# Altium PCB IRDA.PcbDoc
Units mil, origin at the board's own origin, x right, y up, seen from the top; angles counter-clockwise.
Board outline 3020 x 2198 mil, 4 copper layers (Top Layer, PwrPlane, GndPlane, Bottom Layer); 52 components, 34 nets, 373 pads, 123 vias.
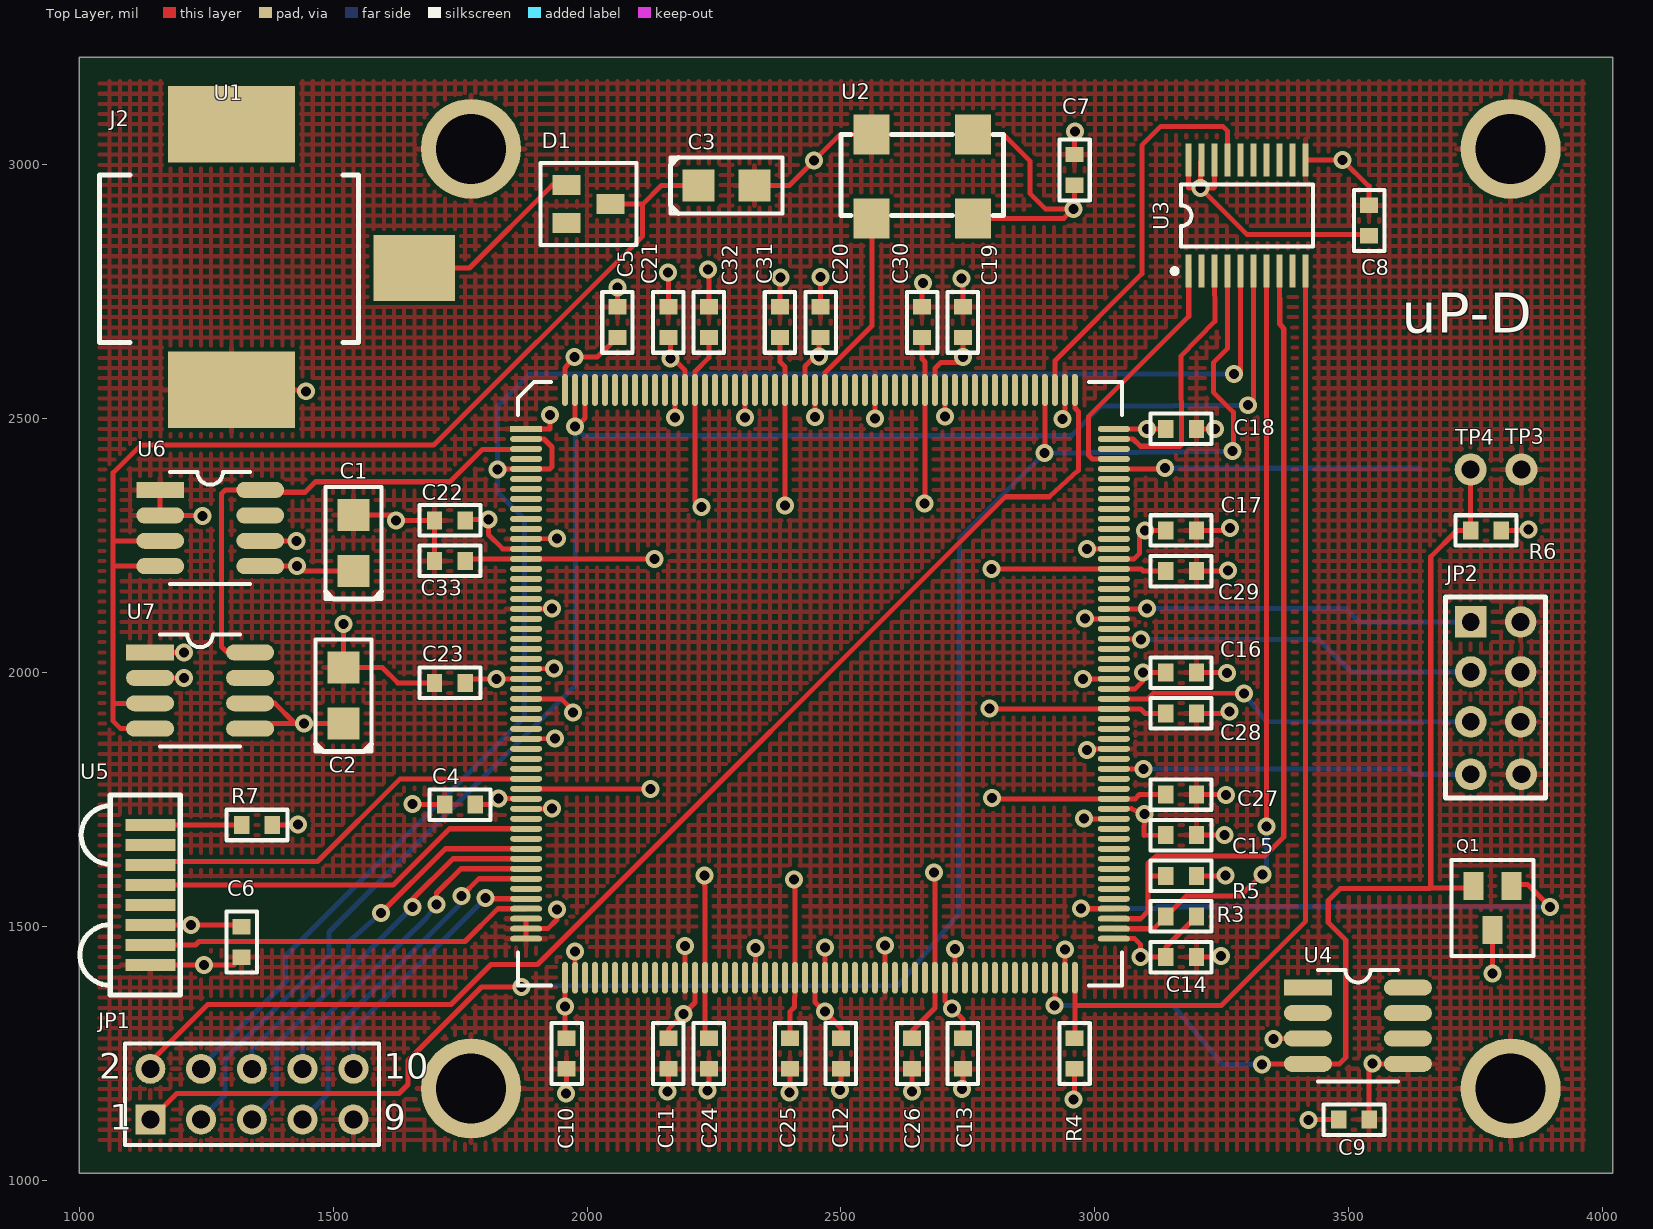
[diagram p0: Top Layer view]
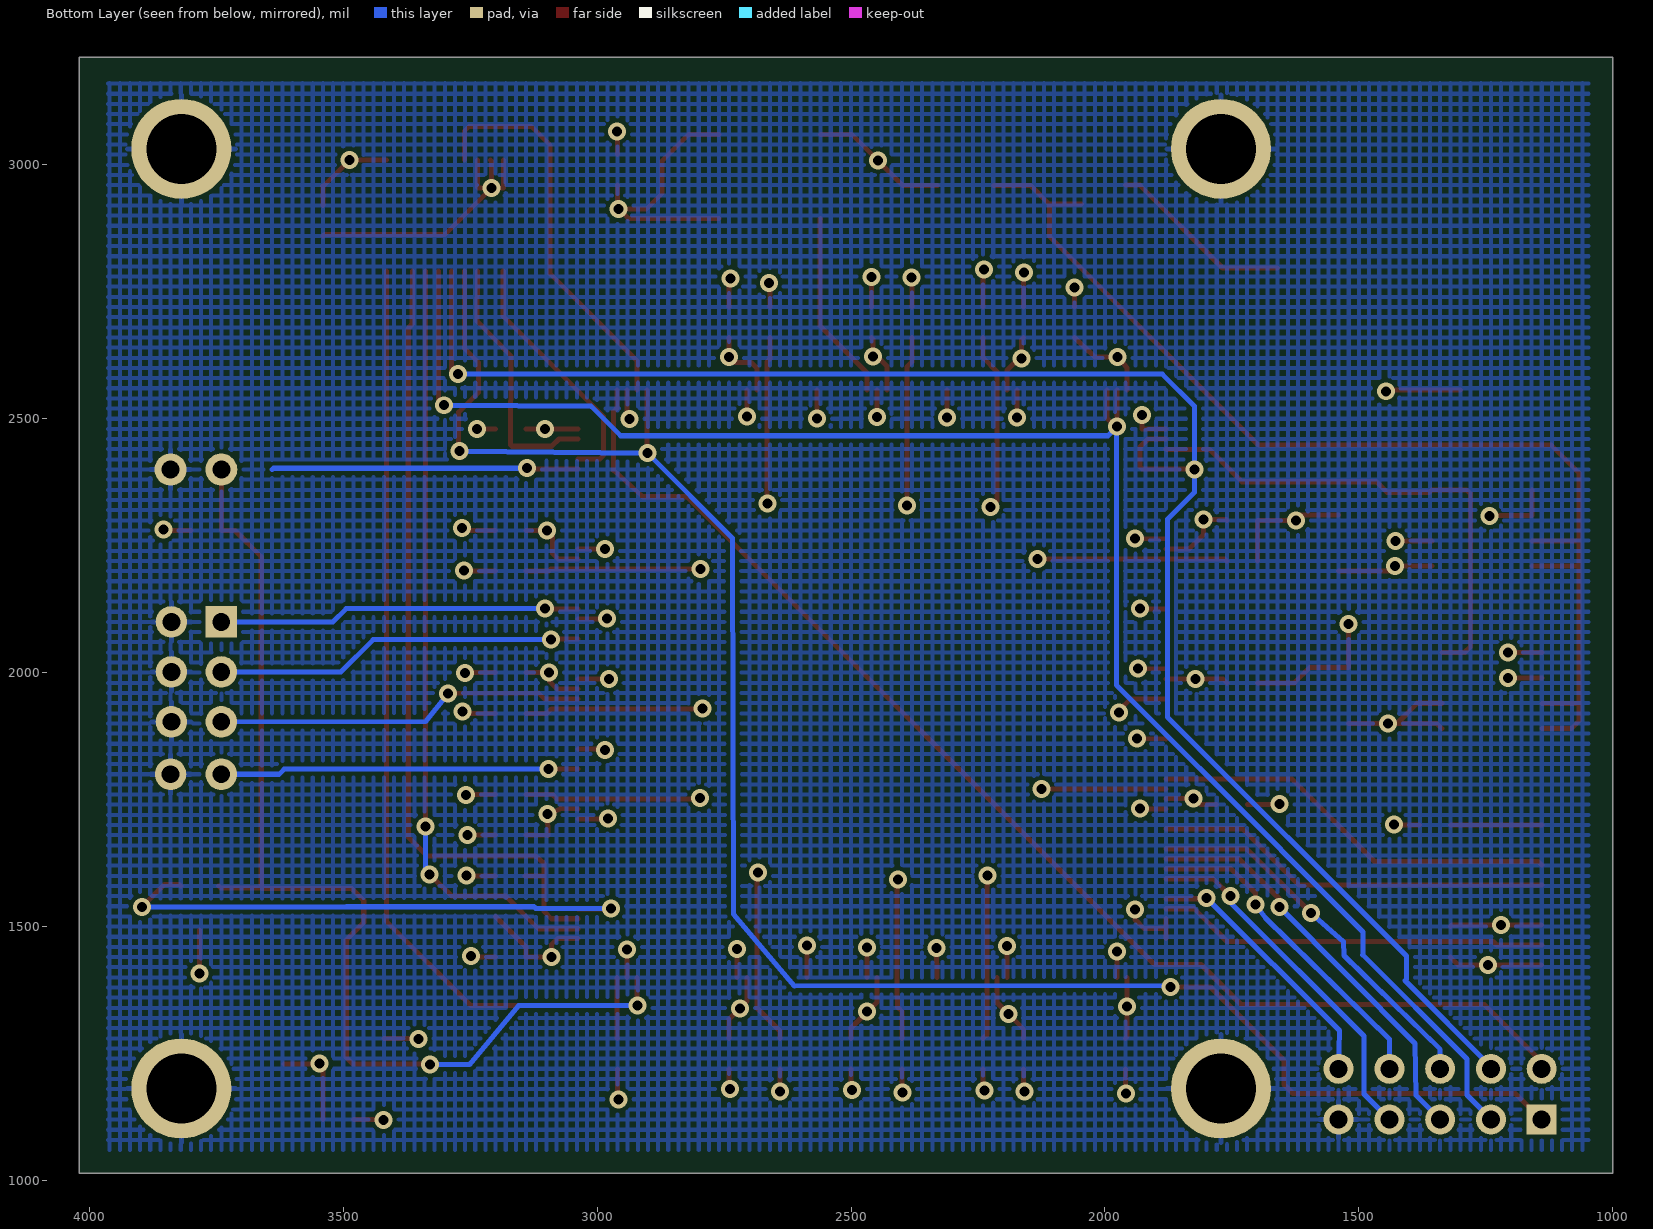
[diagram p1: Bottom Layer view, seen from below]
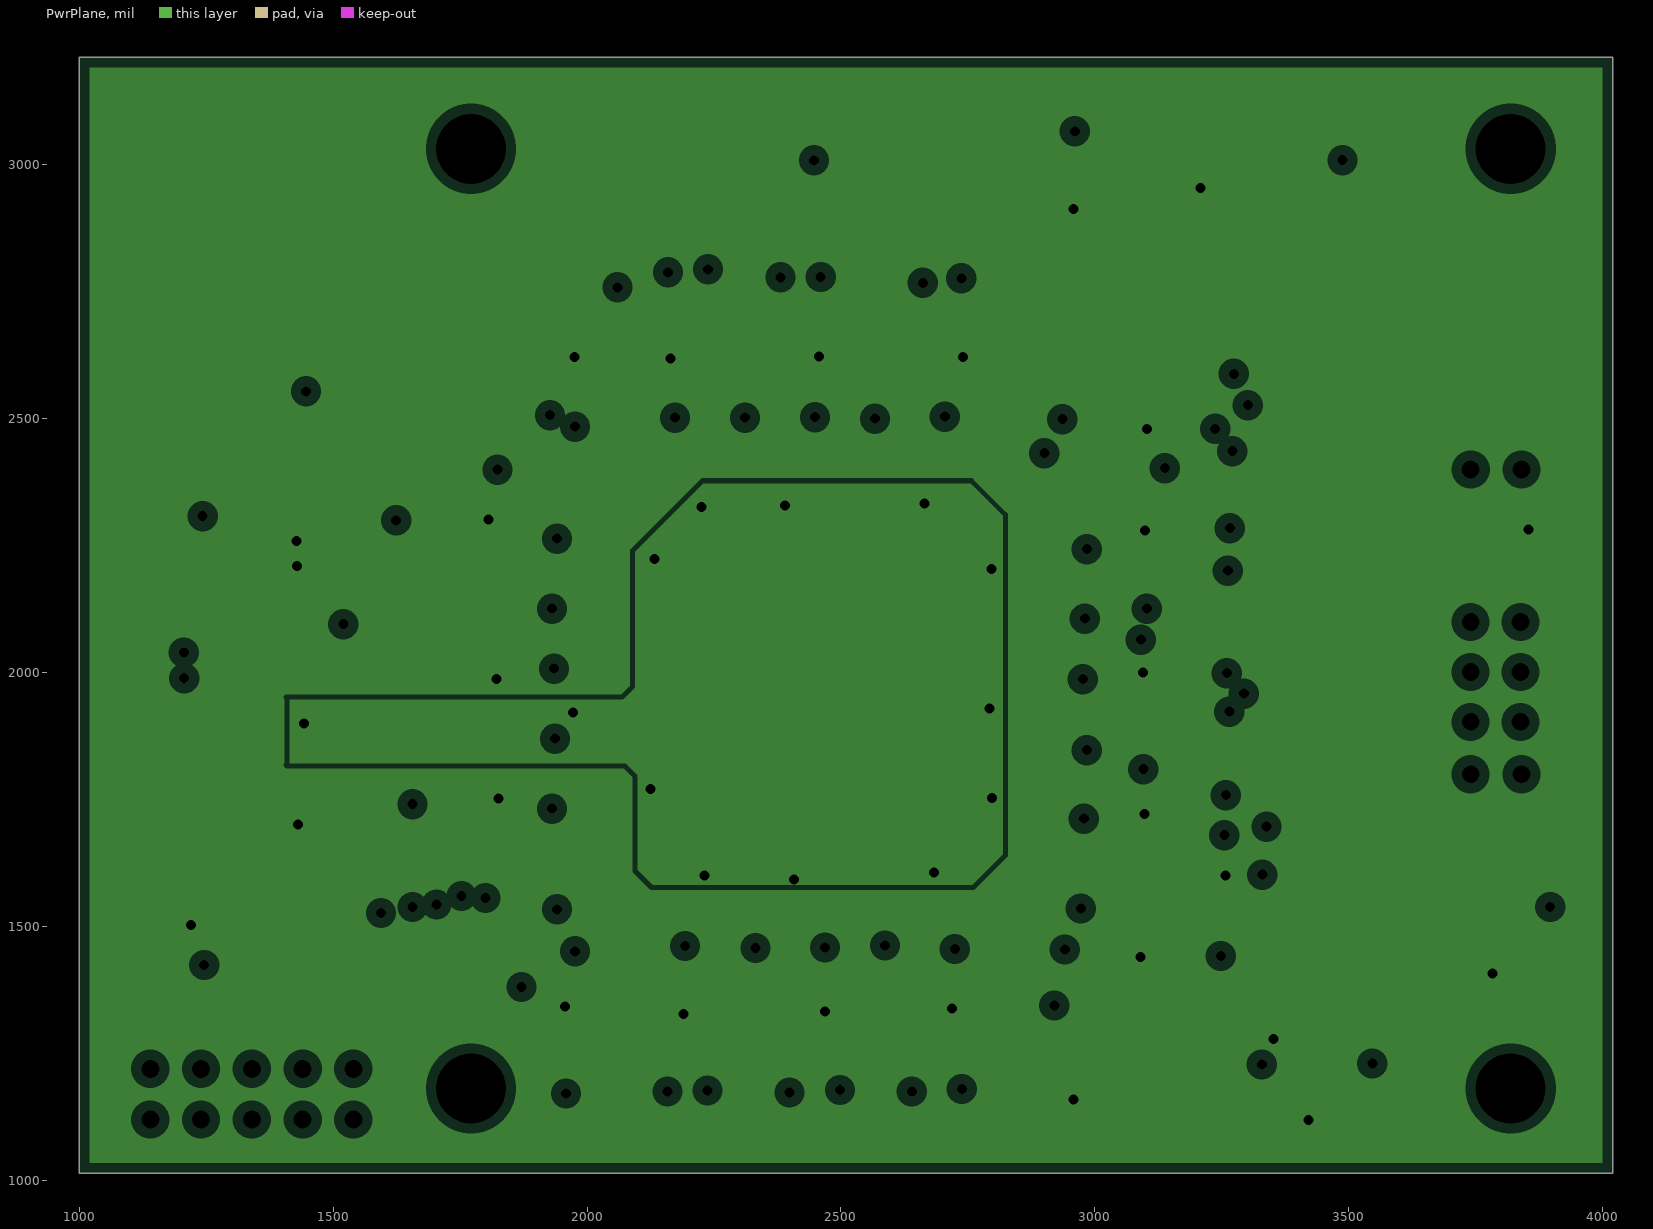
[diagram p2: PwrPlane, clearances drawn from the general rule]
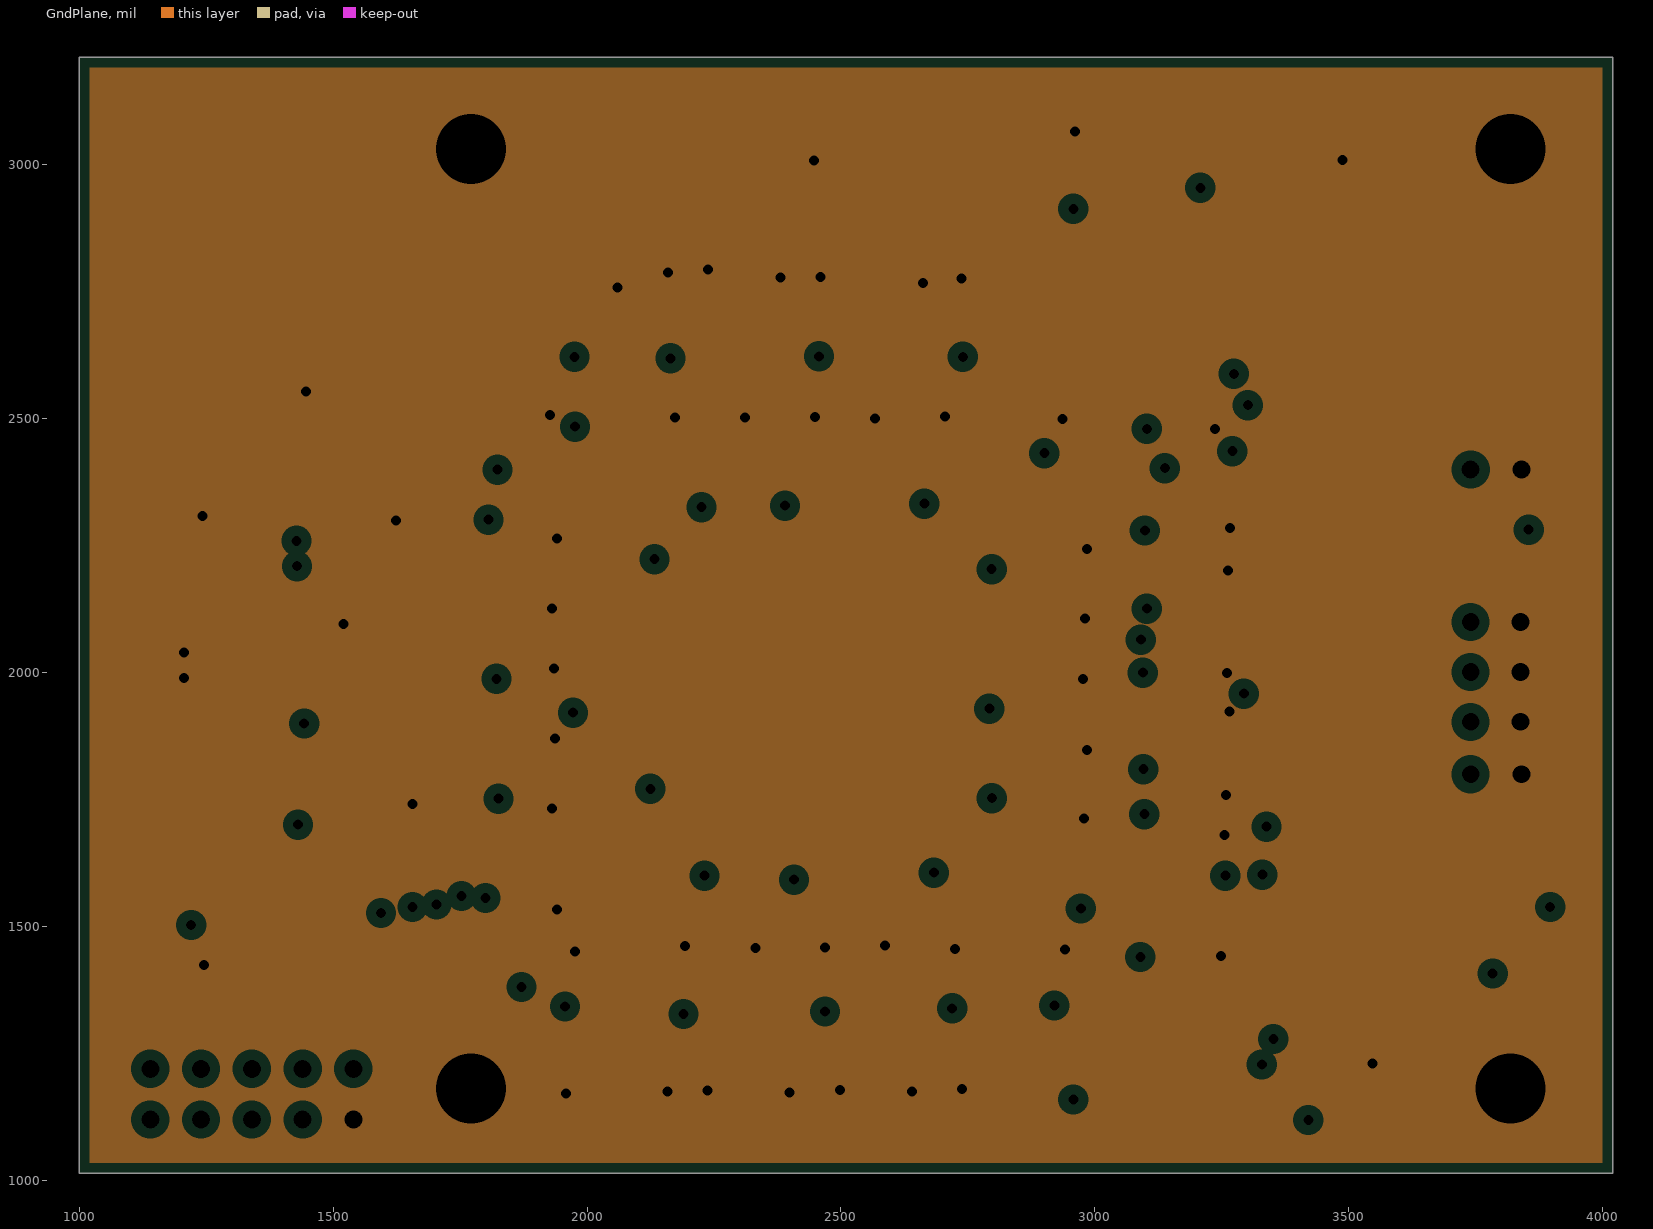
[diagram p3: GndPlane, clearances drawn from the general rule]

## Layer stack, top to bottom
Top Layer: signal copper 1.4
Dielectric: core 12.6, FR-4, Dk 4.8
PwrPlane: plane copper 1.4, net (Multiple Nets)
Dielectric: prepreg 12.6, FR-4, Dk 4.8
GndPlane: plane copper 1.4, net GND
Dielectric: core 12.6, FR-4, Dk 4.8
Bottom Layer: signal copper 1.4

## Board outline
1000,1014 4020,1014 4020,3212 1000,3212

## Design rules (kind name [scope] priority, off if disabled: settings)
Clearance ClearanceQ [(HasFootprint('QFP208')) vs (HasFootprint('QFP208'))] p1: gap=7 // QP208
Clearance clearance [All] p2: gap=7.87 // general
FabricationTestPointUsage TestPointUsage [All] p1: valid=0 allowmultiple=FALSE
FabricationTestpoint Testpoint [All] p1: side=3 testpointundercomponent=TRUE minsize=40 maxsize=100 preferedsize=60 minholesize=0 maxholesize=40 preferedholesize=32 testpointgrid=1 allowsidetop=TRUE allowsidebottom=TRUE usegrid=TRUE gridtolerance=0.01
HoleSize [All] p1: absolutevalues=TRUE maxlimit=157.48 minlimit=1 maxpercent=80.000 minpercent=20.000
PlaneClearance [All] p1: clearance=20
PlaneConnect [All] p1: planeconnectstyle=Relief reliefexpansion=20 reliefentries=4 reliefconductorwidth=10 reliefairgap=10
PolygonConnect [All] p1: connectstyle=Relief reliefconductorwidth=10 reliefentries=4 polygonreliefangle="90 Angle"
RoomDefinition U_IrPwr [InComponentClass('U_IrPwr')] p1: confinementstyle=ConfineOut formatcopy=TRUE lockcomponents=FALSE outline 997,1015 4021,1015 4021,3210 997,3210
RoomDefinition U_IrIO [InComponentClass('U_IrIO')] p2: confinementstyle=ConfineOut formatcopy=TRUE lockcomponents=FALSE outline 997,1015 4021,1015 4021,3210 997,3210
RoomDefinition TopPCB [InComponentClass('TopPCB')] p3: confinementstyle=ConfineOut formatcopy=TRUE lockcomponents=FALSE outline 1011,1011 4021,1011 4021,3210 1011,3210
RoutingVias [All] p1: holewidth=19.68 width=35.43 viastyle="Through Hole" minholewidth=19.68 minwidth=35.43 maxholewidth=19.68 maxwidth=35.43
SilkscreenOverComponentPads [All] p1: minsilkscreentomaskgap=10
SolderMaskExpansion [All] p1: expansion=4
Width Width_P [(InNet('VCC') OR InNet('GND') OR InNet('NOM5V') OR InNet('NOM6V') OR InNet('VCORE'))] p1: maxlimit=100 minlimit=7.87 preferedwidth=9.84
Width [All] p2: maxlimit=10 minlimit=9.84 preferedwidth=10
22 further rules are at their usual default settings.

## Classes and differential pairs
component class U_IO: JP1 JP2 Q1 R6 R7 TP3 TP4 U2 U4 U5
component class FPGA: R3 R4 R5 U3
component class pwr: C1 C2 C3 C4 C5 C6 C7 C8 C9 C10 C11 C12 C13 C14 C15 C16 C17 C18 C19 C20 C21 C22 C23 C24 C25 C26 C27 C28 C29 C30 C31 C32 C33 D1 J2 U6 U7
component class U_FPGA_U1_Auto: U1

## Components (designator, comment, footprint, x,y, rotation, side; value= is the part's Value field where it differs from the comment)
C1 "10uF" 3216POL 1540,2200 r90 top
C2 "10uF" 3216POL 1520,1900 r90 top
C3 "22uF" 3216POL 2220,2960 r0 top
C4 "100nF" M0603 1780,1740 r180 top
C5 "10nF" M0603 2060,2660 r90 top
C6 "100nF" M0603 1320,1500 r270 top
C7 "100nF" M0603 2960,2960 r90 top
C8 "100nF" M0603 3540,2860 r90 top
C9 "100nF" M0603 3480,1120 r0 top
C10 "10nF" M0603 1960,1280 r270 top
C11 "100nF" M0603 2160,1280 r270 top
C12 "10nF" M0603 2500,1280 r270 top
C13 "100nF" M0603 2740,1280 r270 top
C14 "10nF" M0603 3140,1440 r0 top
C15 "100nF" M0603 3140,1680 r0 top
C16 "10nF" M0603 3140,2000 r0 top
C17 "100nF" M0603 3140,2280 r0 top
C18 "10nF" M0603 3140,2480 r0 top
C19 "100nF" M0603 2740,2660 r90 top
C20 "10nF" M0603 2460,2660 r90 top
C21 "100nF" M0603 2160,2660 r90 top
C22 "100nF" M0603 1760,2300 r180 top
C23 "10nF" M0603 1760,1980 r180 top
C24 "100nF" M0603 2240,1280 r270 top
C25 "10nF" M0603 2400,1280 r270 top
C26 "100nF" M0603 2640,1280 r270 top
C27 "10nF" M0603 3140,1760 r0 top
C28 "100nF" M0603 3140,1920 r0 top
C29 "10nF" M0603 3140,2200 r0 top
C30 "100nF" M0603 2660,2660 r90 top
C31 "10nF" M0603 2380,2660 r90 top
C32 "100nF" M0603 2240,2660 r90 top
C33 "100nF" M0603 1760,2220 r180 top
D1 "*" SOT23 1960,2960 r270 top
J2 "*" DC-SOCKET 1300,3080 r270 top
JP1 "Header 5X2" HDR2X5 1140,1120 r0 top
JP2 "HDR4X2" HDR4X2 3740,2100 r270 top
Q1 "BSN20" SOT23 3820,1580 r180 top
R3 "4k7" M0603 3140,1520 r0 top
R4 "4k7" M0603 2960,1280 r270 top
R5 "4k7" M0603 3140,1600 r0 top
R6 "4k7" M0603 3740,2280 r0 top
R7 "10R" M0603 1320,1700 r0 top
TP3 "TP" TP 3740,2400 r90 top locked
TP4 "TP" TP 3840,2400 r90 top locked
U1 "XC2S300E-6PQ208C" QFP208 1880,2480 r0 top
U2 "XCO" QSMO-4200 2760,3060 r270 top
U3 "XCF02SVO20C" VO20 3300,2900 r0 top
U4 "DS18S20Z" SO8 3420,1380 r0 top
U5 "TFDU4100" TDFU4100 1140,1700 r270 top
U6 "TPS77533D" SO8 1160,2360 r0 top
U7 "TPS77518D" SO8 1140,2040 r0 top

## Footprints (in the part's own frame and the unit in brackets; to place one, negate y for a bottom-side part, rotate by r counter-clockwise, add the part's x,y. Pads: shape width x height; smd on the part's side, far side on the other; paste and mask are expansions set on the pad)
3216POL [mm]
  rect 1.6x1.6 smd: 1(-0.002,-0.01) 2(2.798,-0.01)
  silkscreen extent -1.4,-1.41 4.2,1.39
DC-SOCKET [mil]
  rect 150x250 smd: 1(523,0) 2(0,0)
  rect 130x160 smd: 3(283,360)
  silkscreen extent 100,-260 430,250
HDR2X5 [mm]
  rect 1.5x1.5 hole 0.9: 1(0,0)
  round 1.5 hole 0.9: 2(0,2.54) 3(2.54,0) 4(2.54,2.54) 5(5.08,0) 6(5.08,2.54) 7(7.62,0) 8(7.62,2.54) 9(10.16,0) 10(10.16,2.54)
  silkscreen extent -1.27,-1.27 11.43,3.81
HDR4X2 [mil]
  rect 62x62 hole 35: 1(0,0)
  round 62 hole 35: 2(0,98.43) 3(98.42,0) 4(98.42,98.43) 5(196.85,0) 6(196.85,98.43) 7(300,0) 8(300,100)
  silkscreen extent -49,-49 346,148
M0603 [mm]
  rect 0.77x0.9 smd: 1(0,0) 2(1.53,0)
  silkscreen extent -0.76,-0.76 2.29,0.76
QFP208 [mm]
  rect 1.6x0.3 smd: 1(0,0)
  oval 1.6x0.3 smd: 2(0,-0.5) 3(0,-1) 4(0,-1.5) 5(0,-2) 6(0,-2.5) 7(0,-3) 8(0,-3.5) 9(0,-4) 10(0,-4.5) 11(0,-5) 12(0,-5.5) 13(0,-6) 14(0,-6.5) 15(0,-7) 16(0,-7.5) 17(0,-8) 18(0,-8.5) 19(0,-9) 20(0,-9.5) 21(0,-10) 22(0,-10.5) 23(0,-11) 24(0,-11.5) 25(0,-12) 26(0,-12.5) 27(0,-13) 28(0,-13.5) 29(0,-14) 30(0,-14.5) 31(0,-15) 32(0,-15.5) 33(0,-16) 34(0,-16.5) 35(0,-17) 36(0,-17.5) 37(0,-18) 38(0,-18.5) 39(0,-19) 40(0,-19.5) 41(0,-20) 42(0,-20.5) 43(0,-21) 44(0,-21.5) 45(0,-22) 46(0,-22.5) 47(0,-23) 48(0,-23.5) 49(0,-24) 50(0,-24.5) 51(0,-25) 52(0,-25.5) 105(29.4,-25.5) 106(29.4,-25) 107(29.4,-24.5) 108(29.4,-24) 109(29.4,-23.5) 110(29.4,-23) 111(29.4,-22.5) 112(29.4,-22) 113(29.4,-21.5) 114(29.4,-21) 115(29.4,-20.5) 116(29.4,-20) 117(29.4,-19.5) 118(29.4,-19) 119(29.4,-18.5) 120(29.4,-18) 121(29.4,-17.5) 122(29.4,-17) 123(29.4,-16.5) 124(29.4,-16) 125(29.4,-15.5) 126(29.4,-15) 127(29.4,-14.5) 128(29.4,-14) 129(29.4,-13.5) 130(29.4,-13) 131(29.4,-12.5) 132(29.4,-12) 133(29.4,-11.5) 134(29.4,-11) 135(29.4,-10.5) 136(29.4,-10) 137(29.4,-9.5) 138(29.4,-9) 139(29.4,-8.5) 140(29.4,-8) 141(29.4,-7.5) 142(29.4,-7) 143(29.4,-6.5) 144(29.4,-6) 145(29.4,-5.5) 146(29.4,-5) 147(29.4,-4.5) 148(29.4,-4) 149(29.4,-3.5) 150(29.4,-3) 151(29.4,-2.5) 152(29.4,-2) 153(29.4,-1.5) 154(29.4,-1) 155(29.4,-0.5) 156(29.4,0)
  oval 0.3x1.6 smd: 53(1.95,-27.45) 54(2.45,-27.45) 55(2.95,-27.45) 56(3.45,-27.45) 57(3.95,-27.45) 58(4.45,-27.45) 59(4.95,-27.45) 60(5.45,-27.45) 61(5.95,-27.45) 62(6.45,-27.45) 63(6.95,-27.45) 64(7.45,-27.45) 65(7.95,-27.45) 66(8.45,-27.45) 67(8.95,-27.45) 68(9.45,-27.45) 69(9.95,-27.45) 70(10.45,-27.45) 71(10.95,-27.45) 72(11.45,-27.45) 73(11.95,-27.45) 74(12.45,-27.45) 75(12.95,-27.45) 76(13.45,-27.45) 77(13.95,-27.45) 78(14.45,-27.45) 79(14.95,-27.45) 80(15.45,-27.45) 81(15.95,-27.45) 82(16.45,-27.45) 83(16.95,-27.45) 84(17.45,-27.45) 85(17.95,-27.45) 86(18.45,-27.45) 87(18.95,-27.45) 88(19.45,-27.45) 89(19.95,-27.45) 90(20.45,-27.45) 91(20.95,-27.45) 92(21.45,-27.45) 93(21.95,-27.45) 94(22.45,-27.45) 95(22.95,-27.45) 96(23.45,-27.45) 97(23.95,-27.45) 98(24.45,-27.45) 99(24.95,-27.45) 100(25.45,-27.45) 101(25.95,-27.45) 102(26.45,-27.45) 103(26.95,-27.45) 104(27.45,-27.45) 157(27.45,1.95) 158(26.95,1.95) 159(26.45,1.95) 160(25.95,1.95) 161(25.45,1.95) 162(24.95,1.95) 163(24.45,1.95) 164(23.95,1.95) 165(23.45,1.95) 166(22.95,1.95) 167(22.45,1.95) 168(21.95,1.95) 169(21.45,1.95) 170(20.95,1.95) 171(20.45,1.95) 172(19.95,1.95) 173(19.45,1.95) 174(18.95,1.95) 175(18.45,1.95) 176(17.95,1.95) 177(17.45,1.95) 178(16.95,1.95) 179(16.45,1.95) 180(15.95,1.95) 181(15.45,1.95) 182(14.95,1.95) 183(14.45,1.95) 184(13.95,1.95) 185(13.45,1.95) 186(12.95,1.95) 187(12.45,1.95) 188(11.95,1.95) 189(11.45,1.95) 190(10.95,1.95) 191(10.45,1.95) 192(9.95,1.95) 193(9.45,1.95) 194(8.95,1.95) 195(8.45,1.95) 196(7.95,1.95) 197(7.45,1.95) 198(6.95,1.95) 199(6.45,1.95) 200(5.95,1.95) 201(5.45,1.95) 202(4.95,1.95) 203(4.45,1.95) 204(3.95,1.95) 205(3.45,1.95) 206(2.95,1.95) 207(2.45,1.95) 208(1.95,1.95)
  silkscreen extent -0.4,-27.85 29.8,2.35
QSMO-4200 [mm]
  rect 2x1.8 smd: 1(0,0) 2(0,-5.08) 3(4.2,-5.08) 4(4.2,0)
  silkscreen extent 0,-6.6 4.06,1.52
SO8 [mm]
  rect 2.4x0.8 smd: 1(-0.008,-0.006)
  oval 2.4x0.8 smd: 2(-0.008,-1.276) 3(-0.008,-2.546) 4(-0.008,-3.816) 5(4.992,-3.816) 6(4.992,-2.546) 7(4.992,-1.276) 8(4.992,-0.006)
  silkscreen extent 0.49,-4.71 4.49,0.89
SOT23 [mm]
  rect 1x1.4 smd: 1(0,0) 2(0.95,2.2) 3(1.9,0)
  silkscreen extent -1.1,-1.3 3,3.5
TDFU4100 [mm] "IrDA Tranceiver"
  rect 0.6x2.5 smd: 1(0,0) 2(1,0) 3(2,0) 4(3,0) 5(4,0) 6(5,0) 7(6,0) 8(7,0)
  silkscreen extent -1.5,-3.52 8.5,1.5
TP [mm]
  round 1.6 hole 0.9: 1(0,0)
VO20 [mm] "20-Lead TSOP (VO20)"
  rect 0.3x1.65 smd: 1(-2.925,-2.775) 2(-2.275,-2.775) 3(-1.625,-2.775) 4(-0.975,-2.775) 5(-0.325,-2.775) 6(0.325,-2.775) 7(0.975,-2.775) 8(1.625,-2.775) 9(2.275,-2.775) 10(2.925,-2.775) 11(2.925,2.775) 12(2.275,2.775) 13(1.625,2.775) 14(0.975,2.775) 15(0.325,2.775) 16(-0.325,2.775) 17(-0.975,2.775) 18(-1.625,2.775) 19(-2.275,2.775) 20(-2.925,2.775)
  silkscreen extent -3.75,-2.9 3.3,1.55

## Part data
C1 C2 C3: library part CAPACITOR-POL, "ELECTROLYTIC/TANTALUM CAP"
C4 C5 C6 C7 C8 C9 C10 C11 C12 C13 C14 C15 C16 C17 C18 C19 C20 C21 C22 C23 C24 C25 C26 C27 C28 C29 C30 C31 C32 C33: library part CAP, "Cap 0603"
D1: library part DIODE, "DIODE"
J2: library part DC-SOCKET, "Switchcraft RASM712,Kycon KLD-SMT-0201"
JP1: "Header, 5-Pin, Dual row"
JP2: "HEADER 4X2 SQ PIN"
Q1: library part NMOSFET2
R3 R4 R5 R6 R7: library part RES, "SMT RESISTOR"
TP3 TP4: "SMALL PAD"
U1: "Spartan-IIE 1.8V FPGA, 208-Pin PQFP, Standard Performance, Commercial Grade"
U3: "XCF00S Series, Platform Flash In-System Programmable Configuration 3.3V PROM, 20-Pin TSOP, 2-Megabit, Commercial Grade"
U5: library part TDFU4100, "IrDA TxRx"
U6: library part TPS77518D, "LDO 1V8 500mA"
U7: "LDO 1V8 500mA"

## Free pads (board coordinates)
  round 196.85 hole 137.8: ""(1771.65,1181.1) ""(1771.65,3031.5) ""(3818.9,1181.1) ""(3818.9,3031.5)

## Via types
v1: diameter 35.43, hole 19.68, Top Layer to Bottom Layer, 123 vias

## Nets (pads, with @x,y where several pads share a name; then routed paths per layer and width w, separated by ;. In a path a pad name is that pad's centre, name@x,y a point inside that pad or via, vN(x,y) a via of type N, cw(c..) or ccw(c..) an arc to the next point about the centre after c; other vN are vias at no path point)
CC1: JP2.1 U1.138 | length 713.3
  Top Layer w10: U1.138 3087.28,2125.67 v1(3102.36,2125.98)
  Bottom Layer w10: v1(3102.36,2125.98) 3494.09,2125.98 3520.08,2100 JP2.1
CC2: JP2.3 U1.135 | length 729.5
  Top Layer w10: U1.135 3088.9,2066.61 v1(3090.55,2064.96)
  Bottom Layer w10: v1(3090.55,2064.96) 3440.95,2064.96 3504.33,2001.58 JP2.3
CC3: JP2.5 U1.129 | length 733.3
  Top Layer w10: U1.129 3104.02,1948.51 3115.16,1959.65 v1(3293.31,1958.66)
  Bottom Layer w10: v1(3293.31,1958.66) 3338.39,1903.54 JP2.5
CC4: JP2.7 U1.122 | length 707
  Top Layer w10: U1.122 3094.8,1810.71 v1(3095.47,1810.04)
  Bottom Layer w10: v1(3095.47,1810.04) 3616.14,1810.04 3626.18,1800 JP2.7
CCLK: U1.155 U3.3 | length 509.1
  Top Layer w10: U1.155 3075.34,2460.32 3089.79,2445.87 3167.32,2445.87 3170.28,2448.82 3169.29,2623.03 3236.22,2691.93 U3.3
CLK_BRD: U1.182 U2.3 | length 376.6
  Top Layer w10: U1.182 2468.58,2590.63 2561.02,2683.07 2561.02,2893.62 U2.3
DIN: U1.153 U3.1 | length 497.5
  Top Layer w10: U1.153 2994.76,2420.95 2987.2,2428.5 2987.2,2503.94 3184.84,2701.57 U3.1
DONE: R4.1 U1.104 U3.10 | length 1923
  Top Layer w10: R4.1 2960.71,1280.71 U1.104 ; 2960.71,1344.49 3249.02,1344.49 3415.16,1510.63 U3.10
DQ: Q1.3 R6.1 TP3.1 U1.102 U4.4 | length 2181.8
  Top Layer w10: v1(2920.28,1344.49) 2921.34,1361.14 U1.102 ; v1(3328.74,1228.35) 3330.14,1229.75 3481.72,1229.75 3494.09,1242.13 3494.09,1473.43 3459.65,1507.87 3459.65,1551.18 3483.27,1574.8 3660,1574.8 3661.42,1576.22 ; TP3.1 R6.1 3713.07,2280 3661.42,2228.35 3661.42,1576.22 ; Q1.3 3741.42,1576.22 3661.42,1576.22
  Bottom Layer w10: v1(2920.28,1344.49) 3154.53,1344.49 3250.98,1228.35 v1(3328.74,1228.35)
GND: C1.2 C2.2 C3.2 C4.2 C5.2 C6.2 C7.2 C8.2 C9.2 C10.2 C11.2 C12.2 C13.2 C14.2 C15.2 C16.2 C17.2 C18.2 C19.2 C20.2 C21.2 C22.2 C23.2 C24.2 C25.2 C26.2 C27.2 C28.2 C29.2 C30.2 C31.2 C32.2 C33.2 J2.1 JP1.9 JP2.2 JP2.4 JP2.6 JP2.8 pad. TP4.1 U1.1 U1.12 U1.19 U1.25 U1.32 U1.39 U1.50 U1.51 U1.52 U1.54 U1.65 U1.72 U1.79 U1.85 U1.92 U1.103 U1.117 U1.124 U1.131 U1.137 U1.144 U1.158 U1.170 U1.177 U1.183 U1.190 U1.197 U2.2 U3.11 U4.5 U5.8 U6.1 U6.2 U7.1 U7.2 | length 4546.4
  Top Layer w9.84: U7.2 1206.12,1989.75 v1(1206.69,1989.17) ; U7.1 v1(1206.09,2039.75) ; U5.8 1304.65,1424.41 C6.2 ; U6.1 U6.2 1241.43,2309.75 v1(1243.11,2308.07) ; J2.1 1443.98,2557 v1(1446.85,2554.13) ; v1(1520.15,2095.47) 1520.41,2095.73 C2.2 1597.13,2010.16 1627.28,1980 C23.2 ; C1.2 1614.06,2310.16 v1(1624.21,2300) C22.2 C33.2 ; v1(1656.5,1741.14) 1657.64,1740 C4.2 ; U1.52 U1.50 ; U1.39 1930.79,1731.97 v1(1931.1,1732.28) ; U1.32 v1(1937.01,1870.08) ; U1.25 v1(1935.04,2007.87) v1@1935.04,2006.89 ; U1.19 1930.79,2125.67 v1(1931.1,2125.98) ; U1.12 v1(1940.94,2263.78) v1@1940.94,2264.76 ; U1.1 1927.48,2480 v1(1927.17,2506.89) ; U1.51@1880.25,1496 1923,1496 1941,1514 v1(1941,1534) ; v1(1958.66,1171.26) 1960,1172.6 C10.2 ; U1.54 v1(1976.46,1451.18) ; C5.2 2060,2758.82 v1(2060.04,2758.86) ; v1(2158.46,1175.2) 2160,1176.73 C11.2 ; v1(2159.45,2788.39) 2160,2787.83 C21.2 ; v1(2173.23,2501.97) 2173.31,2513.86 U1.197 ; v1(2192.91,1461.61) U1.65 ; v1(2237.2,1177.17) 2240,1179.96 C24.2 ; v1(2238.19,2794.29) 2240,2792.48 C32.2 ; v1(2311.02,2501.97) 2311.1,2512.87 U1.190 ; C3.2 2398.57,2959.59 2498.98,3060 U2.2 ; U1.72 v1(2331.69,1457.68) ; C31.2 2380,2777.64 v1(2380.91,2778.54) ; v1(2398.62,1173.23) 2400,1174.61 C25.2 ; v1(2448.82,2502.95) U1.183 ; C20.2 v1(2460,2779.17) ; v1(2468.5,1458.66) U1.79 ; v1(2498.03,1178.15) 2500,1180.12 C12.2 ; v1(2566.93,2500) 2567.01,2507.95 U1.177 ; v1(2586.61,1462.6) U1.85 ; v1(2639.76,1175.2) 2640,1175.43 C26.2 ; C30.2 2660,2766.3 v1(2661.42,2767.72) ; v1(2704.72,2503.94) U1.170 ; v1(2724.41,1455.71) 2724.49,1447.76 U1.92 ; v1(2737.2,2776.57) 2740,2773.78 C19.2 ; v1(2738.19,1180.12) 2740,1181.93 C13.2 ; v1(2936.02,2499.02) 2941.02,2509.92 U1.158 ; v1(2940.94,1454.72) 2941.02,1440.87 U1.103 ; C7.2 2960,3065.32 v1(2960.63,3065.94) ; v1(2976.38,1987.2) 2988.86,1987.88 U1.131 ; v1(2978.35,1712.6) 2990.83,1712.29 U1.117 ; v1(2980.32,2106.3) 2991.46,2105.99 U1.137 ; v1(2984.25,1847.44) 2986.89,1850.08 U1.124 ; v1(2984.25,2243.11) 2993.78,2243.78 U1.144 ; C14.2 3246.1,1440 v1(3248.03,1441.93) ; C15.2 3254.8,1680 v1(3254.92,1680.12) ; C27.2 3256.73,1760 v1(3257.87,1758.86) ; C28.2 3261.54,1920 v1(3264.76,1923.23) ; C16.2 3258.86,2000 v1(3259.84,1999.02) ; C29.2 3261.02,2200 v1(3261.81,2200.79) ; C17.2 3261.3,2280 v1(3265.75,2284.45) ; C18.2 v1(3236.89,2480) ; U3.11 v1(3487.8,3009.25) 3538.39,2958.66 3540.35,2958.66 ; C8.2 3540,2958.31 ; C9.2 3540.24,1224.29 v1(3546.26,1230.32) 3546.83,1229.75 U4.5
  other v1: 1246.06,1424.41 2446.85,3008.86
INIT: R5.1 U1.107 U3.8 | length 1611.8
  Top Layer w10: U1.107@3037.79,1515.75 U1.107 3090.24,1515.43 3104.33,1529.53 3104.33,1624.02 3121.06,1638.78 3334.65,1638.78 3372.05,1676.18 3372.05,2677.17 3364.17,2687.01 U3.8 ; 3104.33,1599.41 3112.8,1600 R5.1@3142.32,1600
IRRX: U1.41 U5.4 | length 785.9
  Top Layer w10: U5.4 1618.31,1581.89 1729.02,1692.6 U1.41
IRSC: U1.49 U5.7 | length 769.6
  Top Layer w10: U5.7 1229.13,1463.78 1235.83,1470.47 1759.84,1470.47 1824.49,1535.12 U1.49
IRTX: U1.36 U5.3 | length 810.3
  Top Layer w10: U5.3 1147.05,1628.31 1469.49,1628.31 1632.2,1791.03 U1.36
JTAG_NEXUS_TCK: JP1.7 U1.46 | length 711.7
  Top Layer w10: JP1.7 JP1.7@1440.87,1120 ; v1(1752.95,1560.04) 1787.09,1594.17 U1.46
  Bottom Layer w10: JP1.7 1490.16,1170.16 1490.16,1284.31 1752.95,1547.11 v1(1752.95,1560.04)
JTAG_NEXUS_TDI: JP1.5 U1.44 | length 824.7
  Top Layer w10: JP1.5 JP1.5@1340,1124.45 ; v1(1656.5,1538.39) 1656.5,1554.13 1735.91,1633.55 U1.44
  Bottom Layer w10: JP1.5 1387.8,1167.8 1389.76,1269.68 v1(1656.5,1538.39)
JTAG_NEXUS_TDO: 
JTAG_NEXUS_TMS: JP1.8 U1.45 | length 652.8
  Top Layer w10: JP1.8@1438.98,1221.02 JP1.8 ; v1(1703.74,1543.31) 1703.74,1565.94 1751.66,1613.86 U1.45
  Bottom Layer w10: JP1.8 1440,1278.58 1684.06,1516.73 v1(1703.74,1543.31)
NetJP1_6: JP1.6 U1.43 | length 753.5
  Top Layer w10: v1(1594.49,1526.57) 1721.14,1653.23 U1.43
  Bottom Layer w10: JP1.6 1340,1258.31 1529.53,1442.91 1530.51,1470.47 v1(1594.49,1526.57)
NetJP1_10: JP1.10 U1.48 | length 527.5
  Top Layer w10: JP1.10@1538.39,1221.61 JP1.10 ; v1(1800.2,1556.1) 1801.49,1554.81 U1.48
  Bottom Layer w10: JP1.10 1538.39,1295.28 v1(1800.2,1556.1)
NetR7_1: R7.1 U5.1 | length 180
  Top Layer w10: U5.1 R7.1
NOM5V: C3.1 D1.2 U6.3 U6.4 U7.3 U7.4 | length 2316
  Top Layer w9.84: 1066.93,1937.01 1069.67,1939.75 U7.3 ; 1066.93,2207.68 1069,2209.75 U6.4 ; 1066.93,2260.83 1068.01,2259.75 U6.3 ; U7.4 1081.71,1889.75 1066.93,1904.53 1066.93,2393.7 1121.06,2447.83 1697.83,2447.83 2109.61,2859.61 2109.61,2922.6 ; D1.2 2109.61,2922.6 ; C3.1 2146.6,2959.59 2109.61,2922.6
NOM6V: D1.1 J2.3 | length 367.5
  Top Layer w9.84: J2.3 1768.46,2797 1931.46,2960 D1.1
PROGRAM: R3.1 U1.106 U3.7 | length 1537.8
  Top Layer w10: U1.106 3115.75,1495.75 3180.04,1560.04 3286.42,1560.04 v1(3329.72,1602.36) v1@3335.63,1609.25 ; v1(3338.19,1696.85) 3338.39,1696.65 U3.7
  Bottom Layer w10: v1(3329.72,1602.36) 3338.39,1610.04 v1@3338.39,1696.65
RESET_N: U1.3 U6.8 U7.8 | length 1001.6
  Top Layer w10: U7.8 1291.94,2039.75 1280.51,2051.18 1280.51,2352.36 1287.9,2359.75 U6.8 1360.95,2355.32 1444.88,2355.32 1465.55,2375.98 1730.32,2375.98 1794.18,2439.85 1879.22,2439.85 U1.3
SPU_DQ: Q1.1 U1.108 | length 1086.8
  Top Layer w10: v1@2972.75,1535.12 U1.108 ; Q1.1 3822.68,1582.68 3852.36,1582.68 v1(3896.65,1538.39)
  Bottom Layer w10: v1(2972.44,1535.43) 3119.43,1535.43 3120.12,1536.11 3121.14,1536.11 3124.05,1539.03 3493.15,1539.03 3493.79,1538.39 v1(3896.65,1538.39)
TCK: JP1.3 U1.206 U1.207 U3.6 | length 3455.6
  Top Layer w10: U1.207 1976.38,2556.69 v1(1976.38,2484.25) 1979.33,2484.25 1996.14,2501.06 U1.206 ; v1(3301.18,2526.57) 3312.8,2526.38 U3.6
  Bottom Layer w10: JP1.3 1240,1120.91 1287.4,1168.31 1287.4,1239.17 1492.62,1444.39 ; 1492.13,1444.88 1492.13,1489.17 1653.54,1650.59 1653.54,1651.57 1977.36,1975.39 v1@1977.36,2483.27 ; v1(1976.38,2484.25) 1994.09,2466.54 2953.74,2466.54 3011.81,2524.61 v1(3301.18,2526.57)
TDI: U1.159 U3.17 | length 798
  Top Layer w10: U1.159 2921.34,2614.25 3092.52,2785.43 3092.52,3038.39 3129.92,3075.79 3251.97,3075.79 3261.61,3066.14 U3.17
TDIH: JP1.1 U1.160 U3.4 | length 3658.7
  Top Layer w10: JP1.1 1140.67,1120 1191.93,1171.26 1629.92,1171.26 1647.64,1188.98 1647.64,1236.22 1792.32,1380.91 v1(1871.06,1380.91) ; v1(2900.59,2432.09) 2901.65,2433.15 U1.160 ; v1@3261.61,2434.84 v1(3270.67,2436.02) 3272.64,2437.99 3272.64,2512.8 3233.27,2552.17 3233.27,2610.24 3261.61,2638.58 U3.4
  Bottom Layer w10: v1(1871.06,1380.91) 1874.02,1383.86 2611.22,1382.87 2731.3,1524.61 2733.27,2264.76 v1(2900.59,2432.09) v1(3270.67,2436.02)
TDO: JP1.2 U1.157 | length 2483.2
  Top Layer w10: JP1.2 1140,1233.5 1252.95,1346.46 1732.42,1346.46 1811.16,1425.2 1902.56,1425.2 2823.82,2346.46 2910.43,2346.46 2967.52,2398.62 2967.52,2514.49 2960.71,2521.3 U1.157
TEST1: U1.152 | length 604.1
  Top Layer w10: U1.152 3136.5,2401.26 v1(3137.8,2402.56)
  Bottom Layer w10: v1(3137.8,2402.56) 3637.44,2402.56 3640,2400
TMS: JP1.4 U1.2 U1.5 U3.5 | length 3487.5
  Top Layer w10: v1(1823.82,2399.61) 1825.47,2401.26 1926.85,2401.26 1931.1,2405.51 1931.1,2444.32 1915.11,2460.32 U1.2 ; v1@3287.2,2587.8 U3.5
  Bottom Layer w10: JP1.4 1240,1224.25 1409.45,1393.7 ; 1406.5,1396.65 1406.5,1441.93 1876.97,1912.4 1876.97,2302.17 1823.82,2355.31 1823.82,2524.61 1887.01,2587.8 v1@3287.2,2587.8
  other v1: 3273.62,2588.58
VCCINT: C2.1 C24.1 C25.1 C26.1 C27.1 C28.1 C29.1 C30.1 C31.1 C32.1 C33.1 U1.14 U1.28 U1.37 U1.67 U1.76 U1.90 U1.119 U1.128 U1.142 U1.172 U1.186 U1.195 U7.5 U7.6 | length 4083.7
  Top Layer w9.84: C33.1 1764.1,2224.09 2132.2,2224.09 v1(2132.87,2223.43) ; U1.37 v1(2124.68,1771.34) ; U1.28 1949.49,1948.51 1972.44,1925.55 v1(1972.44,1921.26) ; v1(2225.39,2325.79) 2212.68,2338.5 2212.68,2592.6 2240,2619.92 C32.1 ; C31.1 2380,2612.13 2389.84,2602.28 2389.84,2328.82 v1(2389.76,2328.74) ; C25.1 2400,1333.27 2408.46,1341.73 ; C26.1 2640,1294.53 2685.12,1339.65 2685.12,1604.25 v1(2683.07,1606.3) ; C30.1 2660,2617.56 2665.43,2612.13 2665.43,2333.74 v1(2664.37,2332.68) ; v1(2792.32,1929.13) 2792.64,1928.82 3089.88,1928.82 3098.7,1920 C28.1 ; v1(2796.89,2203.74) 2797.56,2204.41 3090.87,2204.41 3095.28,2200 C29.1 ; v1(2797.24,1752.95) 2798.54,1751.65 3079.67,1751.65 3088.02,1760 C27.1
  Top Layer w10: U7.5 1346.69,1899.92 C2.1 ; U7.6 1385.25,1939.75 1425,1900 v1(1443,1900) v1@1443.08,1899.92 ; v1(2231.3,1600.39) 2231.3,1581.03 2232.36,1579.97 2232.36,1287.64 C24.1 ; v1(2407.48,1592.52) 2409.53,1590.47 2409.53,1361.98 2408.46,1360.91 2408.46,1341.73
VCCO: C1.1 C4.1 C5.1 C6.1 C7.1 C8.1 C9.1 C10.1 C11.1 C12.1 C13.1 C14.1 C15.1 C16.1 C17.1 C18.1 C19.1 C20.1 C21.1 C22.1 C23.1 Q1.2 R3.2 R4.2 R5.2 R6.2 R7.2 U1.13 U1.26 U1.38 U1.53 U1.66 U1.78 U1.91 U1.105 U1.118 U1.130 U1.143 U1.156 U1.171 U1.184 U1.196 U1.208 U2.1 U2.4 U3.18 U3.19 U3.20 U4.3 U5.6 U6.5 U6.6 | length 4267.9
  Top Layer w9.84: U5.6 1220.28,1503.15 v1(1220.47,1502.95) 1317.05,1502.95 C6.1 ; U6.5 1429.03,2209.75 1438.86,2199.92 C1.1 ; U6.6 v1(1428.15,2259.65) v1(1428.15,2259.65) ; R7.2 1430.32,1700 v1(1431.1,1700.79) ; C23.1 1767.88,1987.88 U1.26 ; C22.1 1761.18,2301.18 v1(1806.1,2301.18) 1806.1,2271.65 1833.98,2243.78 U1.13 ; C4.1 1811.85,1740 1823.82,1751.97 1879.69,1751.97 U1.38 ; U1.53 1956.77,1283.23 C10.1 ; U1.208 1956.77,2600.31 v1(1975.39,2622.05) 2020.67,2622.05 C5.1 ; C11.1 2160,1297.8 2212.68,1350.47 U1.66 ; C21.1 2164.37,2655.63 v1(2164.37,2619.09) 2174.21,2614.17 2192.99,2595.39 U1.196 ; U1.184 2429.21,2603.27 2441.1,2615.16 v1(2456.69,2623.03) 2456.69,2656.69 C20.1 ; U1.78 2448.9,1351.3 2500,1300.2 C12.1 ; U1.171 2685.12,2599.33 2697.01,2611.22 v1@2738.19,2611.22 ; U1.91 2704.8,1353.27 2740,1318.07 C13.1 ; v1@2740,2613.03 C19.1 ; U2.4 2938.94,2894.65 2960,2915.71 C7.1 ; U2.1 2819.84,3060 2872.05,3007.8 2872.05,2943.9 2902.56,2913.39 v1(2957.68,2913.39) ; v1(2957.68,1159.45) 2960,1161.77 R4.2 ; U1.105 3078.43,1476.07 3089.57,1464.93 v1(3089.57,1439.96) C14.1 ; U1.118 3071.85,1732.28 v1(3097.44,1721.46) 3096.46,1679.13 3126.1,1680 C15.1 ; U1.130 3079.41,1968.19 3093.5,1982.28 v1@3093.5,1999.02 ; U1.143 3077.44,2224.09 3087.6,2234.25 v1@3087.6,2277.56 ; U1.156 C18.1 ; v1(3094.49,2000) C16.1 ; v1(3098.43,2280) 3090.04,2280 C17.1 ; C14.1 C14.1 ; U3.20 3184.84,2955.51 3184.06,2954.72 3234.25,2954.72 3236.02,2956.5 U3.18 ; R3.2 3139.96,1459.72 C14.1 ; R5.2 3256.5,1600 v1(3256.89,1600.39) ; U3.19 3207.68,3006.5 v1(3207.68,2954.72) 3299.21,2863.19 3536.81,2863.19 C8.1 ; v1(3351.38,1278.54) 3352.58,1279.75 U4.3 ; v1(3420.28,1119.09) 3421.18,1120 C9.1 ; Q1.2 3782.6,1408.35 v1(3783.46,1407.48) ; R6.2 3852.83,2280 v1(3854.33,2281.5)
  other v1: 2190.14,1327.93 2468.5,1332.68 2719.05,1339.02 1956.77,1342.52 1825.79,1751.97 1821.85,1987.88 1429.13,2209.65 3102.36,2480 2740,2622.05
pads on no net: D1.3 J2.2 U1.4 U1.6 U1.7 U1.8 U1.9 U1.10 U1.11 U1.15 U1.16 U1.17 U1.18 U1.20 U1.21 U1.22 U1.23 U1.24 U1.27 U1.29 U1.30 U1.31 U1.33 U1.34 U1.35 U1.40 U1.42 U1.47 U1.55 U1.56 U1.57 U1.58 U1.59 U1.60 U1.61 U1.62 U1.63 U1.64 U1.68 U1.69 U1.70 U1.71 U1.73 U1.74 U1.75 U1.77 U1.80 U1.81 U1.82 U1.83 U1.84 U1.86 U1.87 U1.88 U1.89 U1.93 U1.94 U1.95 U1.96 U1.97 U1.98 U1.99 U1.100 U1.101 U1.109 U1.110 U1.111 U1.112 U1.113 U1.114 U1.115 U1.116 U1.120 U1.121 U1.123 U1.125 U1.126 U1.127 U1.132 U1.133 U1.134 U1.136 U1.139 U1.140 U1.141 U1.145 U1.146 U1.147 U1.148 U1.149 U1.150 U1.151 U1.154 U1.161 U1.162 U1.163 U1.164 U1.165 U1.166 U1.167 U1.168 U1.169 U1.173 U1.174 U1.175 U1.176 U1.178 U1.179 U1.180 U1.181 U1.185 U1.187 U1.188 U1.189 U1.191 U1.192 U1.193 U1.194 U1.198 U1.199 U1.200 U1.201 U1.202 U1.203 U1.204 U1.205 U3.2 U3.9 U3.12 U3.13 U3.14 U3.15 U3.16 U4.1 U4.2 U4.6 U4.7 U4.8 U5.2 U5.5 U6.7 U7.7

## Polygon pours and split planes (outlines as drawn)
GND on Top Layer "Top Layer-GND" (hatched 90Degree grid 20 track 8, remove dead copper, pour order 1000): 1048.23,3165.35 3963.58,3165.35 3963.58,1060.04 1040.35,1060.04 1040.35,3165.35
GND on Bottom Layer "Bottom Layer-GND" (hatched 90Degree grid 20 track 8, remove dead copper, pour order 1001): 1048.23,3161.42 3963.58,3161.42 3963.58,1060.04 1048.23,1060.04
VCCO on PwrPlane (split plane): 3999.9,1034.1 1020.1,1034.1 1020.1,3191.9 3999.9,3191.9
VCCINT on PwrPlane (split plane): 2818.72,2308.91 2818.72,1641.88 2758.72,1581.87 2129.08,1581.87 2099.59,1611.36 2099.59,1796.26 2099.2,1798.21 2098.09,1799.86 2078.41,1819.55 2076.75,1820.65 2074.8,1821.04 1414.55,1821.04 1414.55,1946.67 2068.9,1946.67 2070.85,1947.06 2072.5,1948.17 2093.17,1968.84 2094.28,1970.49 2094.66,1972.44 2094.66,2238.05 2229.47,2372.85 2754.78,2372.85
GND on GndPlane (split plane): 3999.9,1034.1 1020.1,1034.1 1020.1,3191.9 3999.9,3191.9

## Other copper
PwrPlane (plane layer: these items are gaps in the copper):
  lines w10: 1407.48,1817.91 1409.45,1815.94 ; 1409.45,1815.94 2074.8,1815.94 2094.49,1796.26 2094.49,1609.25 2126.97,1576.77 2760.83,1576.77 2823.82,1639.76 2823.82,2311.02 2756.89,2377.95 2227.36,2377.95 2089.57,2240.16 2089.57,1972.44 2068.9,1951.77 1407.48,1951.77 1409.45,1949.8 1409.45,1815.94

## Silkscreen, mask and mechanical layers (free items; w line width, h text height)
Top Overlay:
  text "uP-D" at 3604.33,2669.29 h78.74
Mechanical 1:
  the board outline again, w10

## Text inside footprints (layer, text, board x,y; h text height)
JP1: Top Overlay "10" at 1600,1200 h50; Top Overlay "9" at 1600,1100 h50; Top Overlay "1" at 1060,1100 h50; Top Overlay "2" at 1040,1200 h50